# Altium PCB PCB1.pcbdoc
Units mil, origin at the board's own origin, x right, y up, seen from the top; angles counter-clockwise.
Board outline 2600 x 1470 mil, 2 copper layers (Top Layer, Bottom Layer); 26 components, 47 nets, 149 pads, 56 vias.
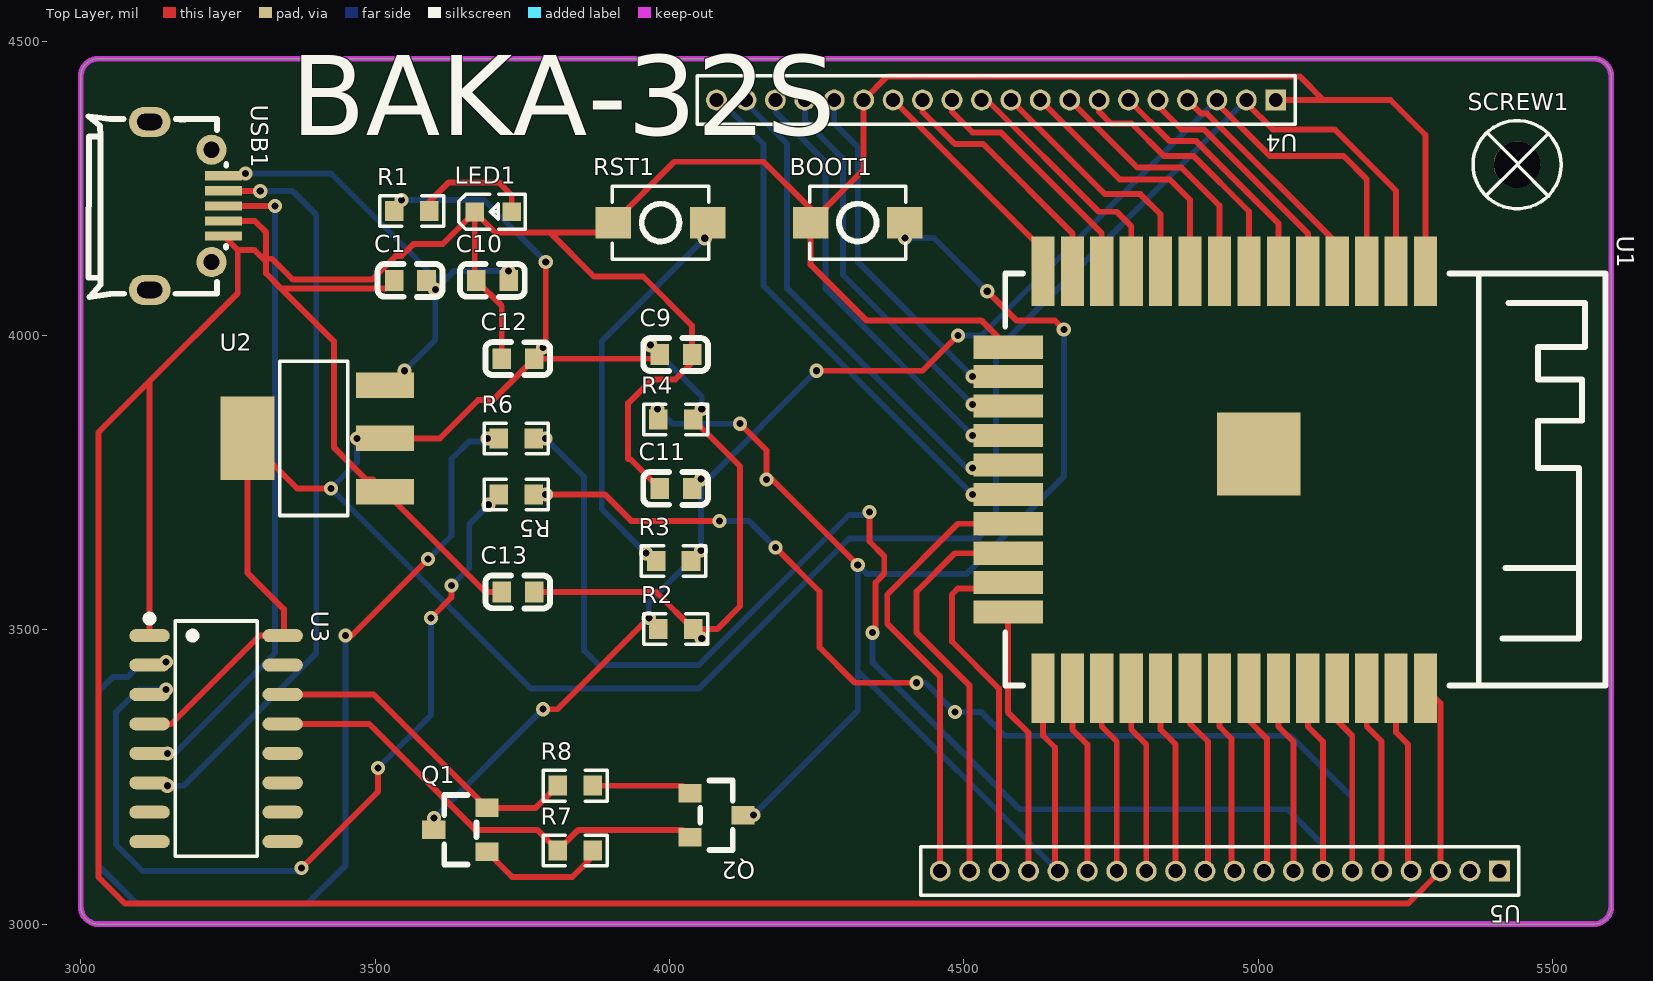
[diagram p0: Top Layer view]
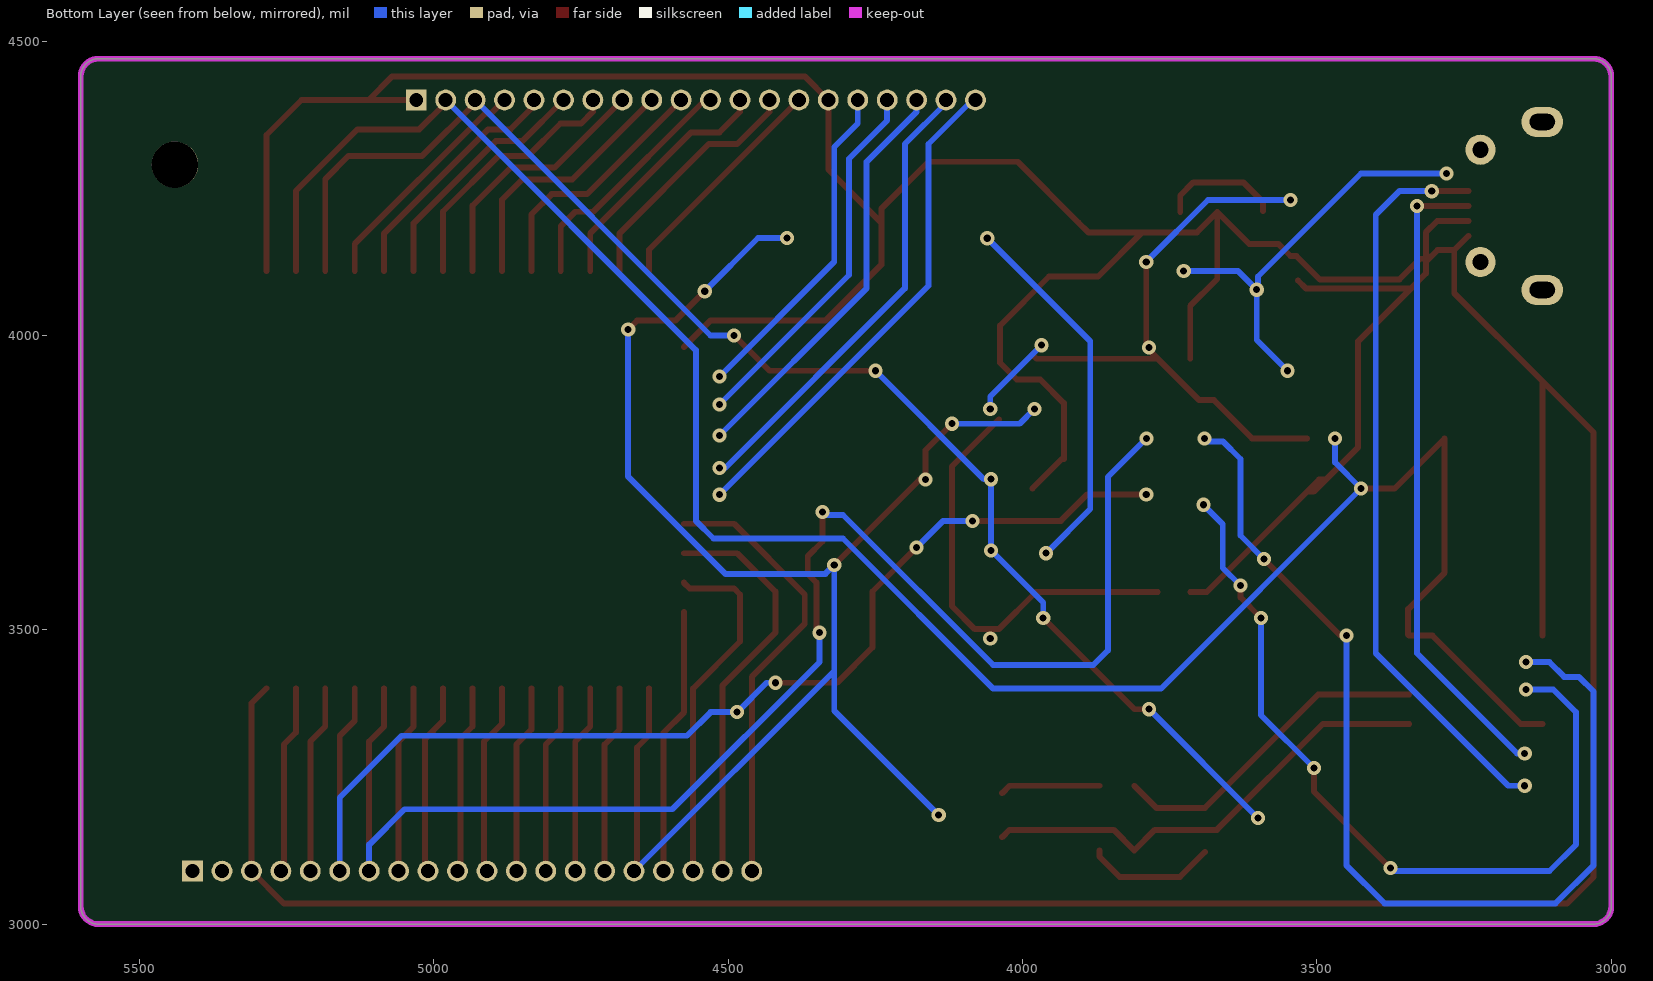
[diagram p1: Bottom Layer view, seen from below]

## Layer stack, top to bottom
Top Layer: signal copper (thickness not stored)
Dielectric: dielectric 12.6, FR-4, Dk 4.8
Bottom Layer: signal copper (thickness not stored)

## Board outline
3030,4470 5570,4470 cw(c5570,4440) 5600,4440 5600,3030 cw(c5570,3030) 5570,3000 3030,3000 cw(c3030,3030) 3000,3030 3000,4440 cw(c3030,4440)

## Components (designator, comment, footprint, x,y, rotation, side; value= is the part's Value field where it differs from the comment)
BOOT1 "ZX-QC34-2TPDZ" Key_SMD_3x4x2 4320,4191.61 r0 top
C1 "CL10A105KB8NNNC" C0603 3559.78,4093.38 r0 top
C9 "CC0603KRX7R9BB104" C0603 4010.94,3967.4 r0 top
C10 "CC0603KRX7R9BB104" C0603 3699.53,4093.38 r0 top
C11 "CL10A105KB8NNNC" C0603 4010.94,3740 r0 top
C12 "CAP_0603" C0603 3742.77,3960.43 r0 top
C13 "CAP_0603" C0603 3742.77,3564.19 r0 top
LED1 "LED_0603-R" LED_0603 3702.74,4210 r0 top
Q1 "S8050_SOT_NPN" S8050_SOT-23 3645,3155 r0 top
Q2 "S8050_SOT_NPN" S8050_SOT-23 4080,3190 r180 top
R1 "Res_0603" R0603 3562.24,4211.14 r0 top
R2 "Res_0603" R0603 4010.63,3501.03 r0 top
R3 "Res_0603" R0603 4007.09,3616.69 r0 top
R4 "Res_0603" R0603 4010.63,3857.3 r0 top
R5 "Res_0603" R0603 3739.97,3730 r180 top
R6 "Res_0603" R0603 3739.97,3825 r0 top
R7 "Res_0603" R0603 3840,3124.95 r0 top
R8 "Res_0603" R0603 3840,3235 r0 top
RST1 "ZX-QC34-2TPDZ" Key_SMD_3x4x2 3985,4191.61 r0 top
SCREW1 "M2螺丝" M2螺丝 5440,4290 r0 top
U1 "ESP32-S" WIRELM-SMD_ESP32-S 4930,3755 r270 top
U2 "AMS1117-3.3_C6186" SOT-223-3_L6.5-W3.4-P2.30-LS7.0-BR 3400,3825 r0 top
U3 "CH340C" SOP-16_L10.0-W3.9-P1.27-LS6.0-BL 3230,3315 r270 top
U4 "KH-1.27FH-1X20P-H4.3" CONN-TH_20P-P1.27_KINGHELM_KH-1.27FH-1X20P-H4.3 4555.04,4400 r180 top
U5 "KH-1.27FH-1X20P-H4.3" CONN-TH_20P-P1.27_KINGHELM_KH-1.27FH-1X20P-H4.3 4935,3090 r180 top
USB1 "MicroXNJ" MICRO-USB-SMD_MICROXNJ 3180,4220 r270 top

## Footprints (in the part's own frame and the unit in brackets; to place one, negate y for a bottom-side part, rotate by r counter-clockwise, add the part's x,y. Pads: shape width x height; smd on the part's side, far side on the other; paste and mask are expansions set on the pad)
C0603 [mm]
  rect 0.8x0.9 smd: 1(-0.7,0) 2(0.7,0)
  silkscreen extent -1.41,-0.71 1.39,0.72
CONN-TH_20P-P1.27_KINGHELM_KH-1.27FH-1X20P-H4.3 [mm]
  rect 0.9x0.9 hole 0.6: 1(-12.065,0)
  round 0.9 hole 0.6: 2(-10.795,0) 3(-9.525,0) 4(-8.255,0) 5(-6.985,0) 6(-5.715,0) 7(-4.445,0) 8(-3.175,0) 9(-1.905,0) 10(-0.635,0) 11(0.635,0) 12(1.905,0) 13(3.175,0) 14(4.445,0) 15(5.715,0) 16(6.985,0) 17(8.255,0) 18(9.525,0) 19(10.795,0) 20(12.065,0)
  silkscreen extent -12.9,-1.05 12.9,1.05
Key_SMD_3x4x2 [mm]
  rect 1.53x1.36 smd: 1(-2.035,0) 2(2.035,0)
  silkscreen extent -2.08,-1.58 2.08,1.58
LED_0603 [mil]
  rect 31.5x31.5 smd: 1(-33.5,-0.4) 2(29.5,-0.2)
  silkscreen extent -61,-30 53,30
M2螺丝 [mm]
  round 2 hole 2: 1(0,0)
  silkscreen extent -1.9,-1.9 1.9,1.9
MICRO-USB-SMD_MICROXNJ [mm]
  rect 0.4x1.6 smd: 1(-1.3,1.596) 2(-0.65,1.596) 3(0,1.596) 4(0.65,1.596) 5(1.3,1.596)
  round 1.3 hole 0.7: 6(2.425,1.074) 9(-2.425,1.074)
  oval 1.3x1.8 hole 0.7 slot 1.1 at 90 deg: 7(3.625,-1.596) 8(-3.625,-1.596)
  silkscreen extent -3.87,-4.24 3.93,1.71
R0603 [mil]
  rect 31.75x34.02 smd: 1(-29.66,0) 2(29.66,0)
  silkscreen extent -55,-26 55,26
S8050_SOT-23 [mm]
  rect 1x0.8 smd: 1(1.15,-0.823) 2(1.15,1.077) 3(-1.15,0.127)
  silkscreen extent -0.7,-1.37 0.7,1.63
SOP-16_L10.0-W3.9-P1.27-LS6.0-BL [mm]
  oval 0.56x1.745 smd: 1(-4.445,-2.872) 2(-3.175,-2.872) 3(-1.905,-2.872) 4(-0.635,-2.872) 5(0.635,-2.872) 6(1.905,-2.872) 7(3.175,-2.872) 8(4.445,-2.872) 9(4.445,2.872) 10(3.175,2.872) 11(1.905,2.872) 12(0.635,2.872) 13(-0.635,2.872) 14(-1.905,2.872) 15(-3.175,2.872) 16(-4.445,2.872)
  silkscreen extent -5.33,-3.02 5.08,1.77
SOT-223-3_L6.5-W3.4-P2.30-LS7.0-BR [mm]
  rect 2.5x1.1 smd: 1(2.97,-2.3) 2(2.97,0) 3(2.97,2.3)
  rect 2.34x3.6 smd: 4(-2.97,0)
  silkscreen extent -1.57,-3.33 1.37,3.33
WIRELM-SMD_ESP32-S [mm]
  rect 3x1 smd: 1(-9,9.005) 2(-9,7.735) 3(-9,6.465) 4(-9,5.195) 5(-9,3.925) 6(-9,2.655) 7(-9,1.385) 8(-9,0.115) 9(-9,-1.155) 10(-9,-2.425) 11(-9,-3.695) 12(-9,-4.965) 13(-9,-6.235) 14(-9,-7.505) 25(9,-7.505) 26(9,-6.235) 27(9,-4.965) 28(9,-3.695) 29(9,-2.425) 30(9,-1.155) 31(9,0.115) 32(9,1.385) 33(9,2.655) 34(9,3.925) 35(9,5.195) 36(9,6.465) 37(9,7.735) 38(9,9.005)
  rect 1x3 smd: 15(-5.715,-9.005) 16(-4.445,-9.005) 17(-3.175,-9.005) 18(-1.905,-9.005) 19(-0.635,-9.005) 20(0.635,-9.005) 21(1.905,-9.005) 22(3.175,-9.005) 23(4.445,-9.005) 24(5.715,-9.005)
  rect 3.6x3.6 smd: 39(-1.105,1.815)
  silkscreen extent -8.89,-9.13 8.89,16.78

## Via types
v1: diameter 24.02, hole 12.01, Top Layer to Bottom Layer, 56 vias

## Nets (pads, with @x,y where several pads share a name; then routed paths per layer and width w, separated by ;. In a path a pad name is that pad's centre, name@x,y a point inside that pad or via, vN(x,y) a via of type N, cw(c..) or ccw(c..) an arc to the next point about the centre after c; other vN are vias at no path point)
$1N1245: U3.5 USB1.3 | length 1100.5
  Top Layer w10: USB1.3 v1(3330,4220)
  Bottom Layer w10: v1(3147.07,3290) 3160,3290 3330,3460 v1(3330,4220)
$1N1248: U3.6 USB1.2 | length 1265.1
  Top Layer w10: USB1.2 3304.41,4245.59 v1(3305,4245)
  Bottom Layer w10: v1(3147.07,3235) 3175,3235 3400,3460 3400,4205 3360,4245 v1(3305,4245)
$1N1575: LED1.2 R1.2 | length 207
  Top Layer w10: R1.2 3591.9,4226.9 3625,4260 3710,4260 3732.24,4237.76 LED1.2
$1N2232: R3.1 RST1.2 | length 638.6
  Bottom Layer w10: v1(3960,3630) 3885,3705 3885,3990 v1(4060,4165)
$1N2534: R5.2 U3.3 | length 1410.6
  Top Layer w10: v1(3375,3095) 3505,3225 v1(3505,3265) ; v1(3595,3520) 3630,3555 v1(3630,3575)
  Bottom Layer w10: v1(3145,3398.51) 3098.51,3398.51 3060,3360 3060,3135 3105,3090 3370,3090 v1(3375,3095) ; v1(3505,3265) 3595,3355 v1(3595,3520) ; v1(3630,3575) 3660,3605 3660,3679.36 v1(3692.92,3712.28)
$1N2592: R6.1 U3.2 | length 1750.4
  Top Layer w10: v1(3450,3490) 3460,3490 v1(3590,3620)
  Bottom Layer w10: v1(3145,3445) 3105,3445 3080,3420 3055,3420 3030,3395 3030,3100 3095,3035 3385,3035 3450,3100 v1(3450,3490) ; v1(3590,3620) 3630,3660 3630,3790 3660,3820 3685.95,3820 v1(3690.95,3825)
$1N3016: U1.4 U4.4 | length 401.9
  Top Layer w10: U4.4 4903.38,4376.66 4913.34,4376.66 5134.53,4155.47 U1.4
$1N3021: U1.5 U4.5 | length 418.3
  Top Layer w10: U4.5 4830.04,4389.96 4870,4350 4907.91,4350 5084.53,4173.39 U1.5
$1N3026: U1.6 U4.6 | length 422.4
  Top Layer w10: U4.6 4850.04,4330 4895,4330 5034.53,4190.47 U1.6
$1N3032: U1.7 U4.7 | length 445.9
  Top Layer w10: U4.7 4730.04,4379.96 4750,4360 4785,4360 4840,4305 4890,4305 4984.53,4210.47 U1.7
$1N3040: U1.8 U4.8 | length 440
  Top Layer w10: U4.8 4795.04,4285 4870,4285 4934.53,4220.47 U1.8
$1N3062: U1.10 U4.10 | length 431.2
  Top Layer w10: U4.10 4739.96,4240 4800,4240 4834.53,4205.47 U1.10
$1N3067: U1.11 U4.11 | length 419.5
  Top Layer w10: U4.11 4539.47,4399.96 4729.43,4210 4760,4210 4784.53,4185.47 U1.11
$1N3077: U1.12 U4.12 | length 424.2
  Top Layer w10: U4.12 4480.04,4379.96 4515,4345 4562.91,4345 4734.53,4173.39 U1.12
$1N3132: U1.13 U4.13 | length 424.2
  Top Layer w10: U4.13 4430.04,4379.96 4485,4325 4532.91,4325 4684.53,4173.39 U1.13
$1N3142: U1.14 U4.14 | length 396.1
  Top Layer w10: U4.14 4634.53,4145.51 U1.14
$1N3158: U1.16 U4.16 | length 567.3
  Bottom Layer w10: U4.16 4280.04,4359.96 4320,4320 4320,4125 v1(4515,3930)
$1N3164: U1.17 U4.17 | length 635.5
  Bottom Layer w10: U4.17 4230.04,4364.96 4295,4300 4295,4102.49 v1(4515,3882.49)
$1N3186: U1.9 U4.9 | length 445.9
  Top Layer w10: U4.9 4765.04,4265 4850,4265 4884.53,4230.47 U1.9
$1N3196: U1.18 U4.18 | length 708.7
  Bottom Layer w10: U4.18 4180.04,4379.96 4265,4295 4265,4080 v1(4515,3830)
$1N3205: U1.19 U4.19 | length 790.5
  Bottom Layer w10: U4.19 4130.04,4394.96 4200,4325 4200,4080 4505.49,3774.51 v1(4515,3774.51)
$1N3217: U1.20 U4.20 | length 853.7
  Bottom Layer w10: U4.20 4085,4400 4160,4325 4160,4084.4 v1(4515,3729.4)
$1N3223: U1.21 U5.20 | length 762.5
  Top Layer w10: U5.20 4460,3420 4370,3510 4370,3560 4490,3680 U1.21
$1N3238: U1.22 U5.19 | length 694.7
  Top Layer w10: U5.19 4510,3405 4420,3495 4420,3565 4485,3630 U1.22
$1N3250: U1.23 U5.18 | length 606.9
  Top Layer w10: U5.18 4560,3400 4480,3480 4480,3560 4490,3570 4565.47,3570 U1.23
$1N3267: U1.24 U5.17 | length 454.7
  Top Layer w10: U1.24 4575,3529.53 4575,3360 4610,3325 U5.17
$1N3296: U1.26 U5.15 | length 321.2
  Top Layer w10: U1.26 4684.53,3330.47 4710,3305 U5.15
$1N3428: U1.27 U5.14 | length 321.2
  Top Layer w10: U1.27 4734.53,3335.47 4760,3310 U5.14
$1N3442: U1.28 U5.13 | length 321.2
  Top Layer w10: U1.28 4784.53,3330.47 4810,3305 U5.13
$1N3458: U1.29 U5.12 | length 321.2
  Top Layer w10: U1.29 4834.53,3330.47 4860,3305 U5.12
$1N3474: U1.30 U5.11 | length 325.4
  Top Layer w10: U1.30 4884.53,3340.47 4915,3310 4915,3095 U5.11
$1N3488: U1.31 U5.10 | length 321.2
  Top Layer w10: U1.31 4934.53,3335.47 4955,3315 4955,3095 U5.10
$1N3502: U1.32 U5.9 | length 325.4
  Top Layer w10: U1.32 4984.53,3345.47 5015,3315 5015,3095 U5.9
$1N3520: U1.33 U5.8 | length 321.2
  Top Layer w10: U1.33 5034.53,3335.47 5060,3310 U5.8
$1N3598: U1.36 U5.5 | length 321.2
  Top Layer w10: U1.36 5184.53,3335.47 5210,3310 U5.5
$1N3608: U1.37 U5.4 | length 321.2
  Top Layer w10: U1.37 5234.53,3325.47 5255,3305 5255,3095 U5.4
$1N3762: C1.2 C10.2 U2.3 USB1.1 | length 712.2
  Bottom Layer w10: v1(3280,4275) 3425,4275 3600,4100 3600,4079.94 v1(3602.31,4077.63) ; v1(3550,3940) 3602.31,3992.31 v1(3602.31,4077.63) ; v1(3726.31,4109.12) 3633.81,4109.12 v1(3602.31,4077.63)
$1N4447: Q1.1 R7.2 | length 221.7
  Top Layer w10: Q1.1 3732.87,3080 3835,3080 3869.66,3114.66 R7.2
$1N4484: C11.2 Q1.3 R2.1 R3.2 U1.3 U4.3 | length 2391
  Top Layer w10: v1(3785,3365) 3810,3365 v1(3965,3520) ; v1(4250,3940) 4430,3940 v1(4490,4000) ; U4.3 4930.04,4394.96 5020,4305 5145,4305 5184.53,4265.47 U1.3
  Bottom Layer w10: v1(3600,3180) v1(3785,3365) ; v1(3965,3520) 3965,3546.16 v1(4053.46,3634.62) v1(4053.46,3755.74) 4065.74,3755.74 v1(4250,3940) ; v1(4490,4000) 4530.04,4000 U4.3
$1N4507: Q1.2 R8.1 U3.14 | length 562.6
  Top Layer w10: U3.14 3497.68,3390 Q1.2 3772.74,3197.4 R8.1
$1N4576: Q2.1 R8.2 | length 170.3
  Top Layer w10: R8.2 4022.13,3235 Q2.1
$1N4656: R5.1 U1.35 U5.6 | length 2085.2
  Top Layer w10: v1(3790,3730) 3890,3730 3935,3685 v1(4085,3685) ; v1(4180,3640) 4255,3565 4255,3470 4315,3410 v1(4420,3410) ; U1.35 5134.53,3345.47 5160,3320 U5.6
  Bottom Layer w10: v1(4085,3685) 4135,3685 v1(4180,3640) ; v1(4420,3410) 4435,3410 v1(4485,3360) 4530,3360 4570,3320 5055,3320 5160,3215 U5.6
$1N4689: R6.2 U1.34 U5.7 | length 2523.4
  Top Layer w10: v1(4340,3700) 4340,3650 4365,3625 4365,3595 4350,3580 4350,3500 v1(4345,3495) ; U1.34 5084.53,3335.47 5110,3310 U5.7
  Bottom Layer w10: v1(3789.72,3825) 3855,3759.72 3855,3465 3880,3440 4050,3440 4305,3695 4335,3695 v1(4340,3700) ; v1(4345,3495) 4345,3445 4595,3195 5050,3195 5110,3135 U5.7
$1N4721: BOOT1.2 Q2.3 R4.1 U1.25 U5.16 | length 2788.5
  Top Layer w10: v1(4120,3850) 4165,3805 v1(4165,3755) 4175,3755 v1(4320,3610) ; v1(4540,4075) 4590,4025 4655,4025 v1(4670,4010) ; U1.25 4634.53,3320.47 4655,3300 4655,3095 U5.16
  Bottom Layer w10: v1(3980,3875) 4005,3850 v1(4120,3850) ; v1(4142.53,3185) 4320,3362.47 4320,3430 ; v1(4400.12,4165.52) 4449.48,4165.52 v1(4540,4075) ; U5.16 4320,3430 ; v1(4670,4010) 4670,3760 4505,3595 4335,3595 v1(4320,3610) 4320,3430
$1N4733: Q2.2 R7.1 U3.13 | length 800.4
  Top Layer w10: U3.13 3490,3340 3670,3160 3775.29,3160 R7.1 3845.39,3160 4022.32,3160 Q2.2
GND: BOOT1.1 C1.1 C9.2 C10.1 C11.1 C12.1 C13.1 LED1.1 RST1.1 U1.1 U1.15 U1.38 U2.1 U3.1 U4.1 U4.15 U5.3 USB1.4 USB1.5 | length 9533.3
  Top Layer w10: U3.1 3116.91,3921.91 ; USB1.5 3266.67,4145 ; USB1.4 3295.59,4194.41 3315,4175 3315,4130.16 ; C1.1 3518.84,4080 3340,4080 ; C13.1 3687.19,3564.19 U2.1 ; C12.1 3715.21,4050.14 C10.1 3669.24,4096.11 LED1.1 ; C11.1 3933.38,3790 3930,3790 3930,3885 3970,3925 4010,3925 4038.5,3953.5 C9.2 4038.5,4016.5 3955,4100 3871.67,4100 3796.67,4175 ; U1.15 4530.47,4025 4335,4025 4239.88,4120.12 BOOT1.1 ; U4.1 5110.72,4400 ; U1.38 5310,3375.2 U5.3 5255,3035 3075,3035 3030,3080 3030,3835 3116.91,3921.91 ; U1.1 5284.53,4340.47 5225,4400 5110.72,4400 ; 3116.91,3921.91 3266.67,4071.67 3266.67,4145 ; 3266.67,4145 3295,4145 3312.42,4127.58 3315,4130.16 ; 3315,4130.16 3315,4105 3340,4080 ; 3315,4130.16 3324.84,4130.16 3360,4095 3495,4095 3535,4135 3545,4135 3565,4155 3615,4155 3615,4155.36 LED1.1 ; 3340,4080 3430,3990 3430,3810 U2.1@3485,3755 ; U2.1@3485,3755 3496.38,3755 U2.1 ; U2.1@3485,3755 3505.55,3734.45 U2.1 ; LED1.1 3703.84,4175 3796.67,4175 ; 3796.67,4175 3888.27,4175 RST1.1 4008.27,4295 4160,4295 4239.88,4215.12 BOOT1.1 ; BOOT1.1 4330.04,4281.77 U4.15 4370.04,4440 5070.72,4440 5110.72,4400
VCC: C9.1 C12.2 C13.2 R1.1 R2.2 R4.2 U1.2 U2.2 U2.4 U3.4 U3.16 U4.2 | length 5541.1
  Top Layer w10: U3.4 3153.74,3340 3303.74,3490 U3.16 3345,3491.91 3345,3535 3283.07,3596.93 U2.4 3368.07,3740 v1(3425,3740) ; U2.2 3610,3825 3675,3890 3699.9,3890 C12.2 ; C13.2 3977.13,3564.19 R2.2 4081.03,3501.03 4120,3540 4120,3777.59 R4.2 ; v1(3790,4125) 3790,3980.1 C12.2 ; C9.1 3976.41,3960.43 C12.2 ; U4.2 4980.04,4394.96 5025,4350 5130,4350 5234.53,4245.47 U1.2
  Bottom Layer w10: v1(3469.07,3825) 3469.07,3784.07 v1(3425,3740) 3765,3400 4050,3400 4305,3655 4525,3655 4555,3685 4555,3974.96 U4.2 ; v1(3545,4230) 3685,4230 v1(3790,4125) ; v1(3967.8,3983.37) 4055,3896.17 v1(4055,3875)
  other v1: 4055,3485 3785.3,3979.27
pads on no net: SCREW1.1 U1.39 U3.7 U3.8 U3.9 U3.10 U3.11 U3.12 U3.15 U5.1 U5.2 USB1.6 USB1.7 USB1.8 USB1.9

## Keep-outs
Board Outline Layer:
  the board outline again, w10

## Silkscreen, mask and mechanical layers (free items; w line width, h text height)
Top Silkscreen Layer:
  text "BAKA-32S" at 3356.85,4340.08 h135.94